# Altium PCB Test_Monitor_PCB1.PcbDoc (part 2 of 3)
Units mm, origin at the board's own origin, x right, y up, seen from the top; angles counter-clockwise.
Board outline 100 x 83 mm, 4 copper layers (Top Layer, GND1, GND2, Bottom Layer), stack 1.57 mm thick; 215 components, 124 nets, 896 pads, 300 vias.
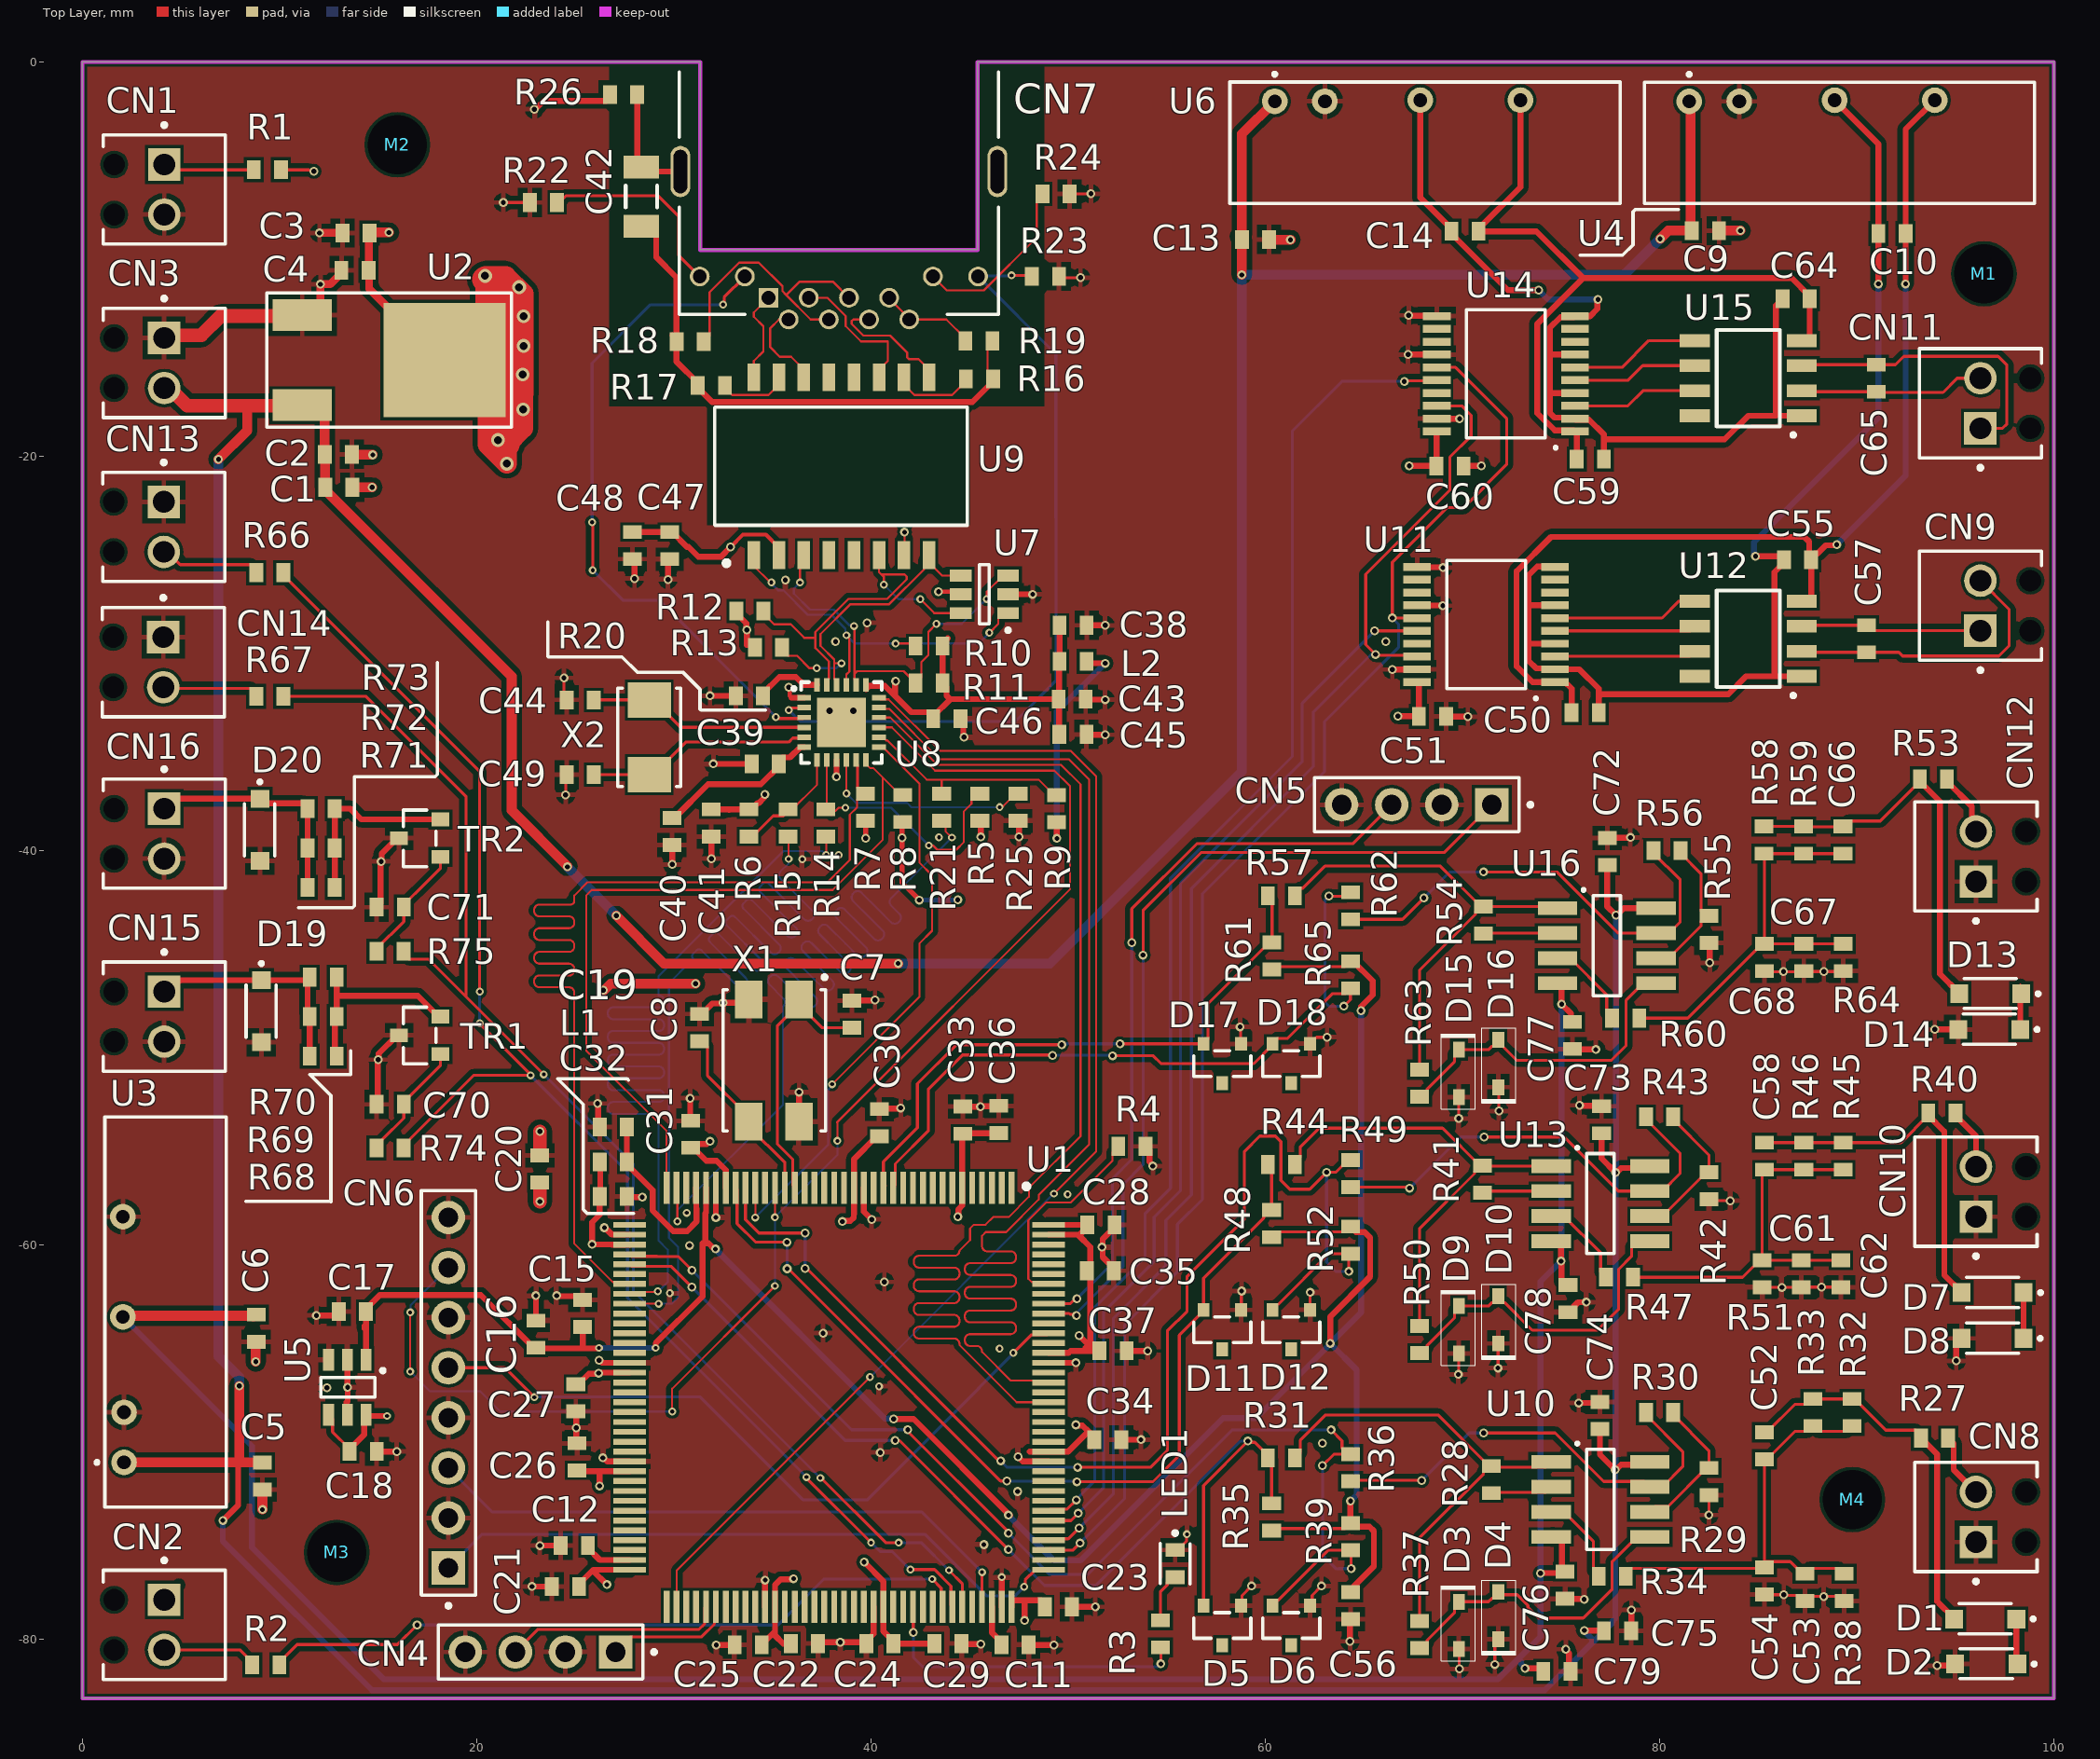
[diagram p0: Top Layer view]

## Via types
v1: diameter 0.45, hole 0.25, Top Layer to Bottom Layer, 224 vias
v2: diameter 0.4, hole 0.2, Top Layer to Bottom Layer, 66 vias
v3: diameter 0.7, hole 0.4, Top Layer to Bottom Layer, 8 vias
v4: diameter 0.66, hole 0.33, Top Layer to Bottom Layer, 2 vias

## Nets (pads, with @x,y where several pads share a name; then routed paths per layer and width w, separated by ;. In a path a pad name is that pad's centre, name@x,y a point inside that pad or via, vN(x,y) a via of type N, cw(c..) or ccw(c..) an arc to the next point about the centre after c; other vN are vias at no path point) (continued)
GND: (continued)
  Top Layer w0.381: CN16.2@4.27,-40.41 CN16.2@4.325,-40.465 ; CN15.2@4.37,-49.69 CN15.2@4.405,-49.725 ; D20.1@8.945,-40.465 D20.1@9,-40.52
  Top Layer w0.4: U2.1@11.145,-12.835 11.325,-12.835 12.075,-12.085 v1(12.075,-11.275) 12.085,-11.265 12.572,-11.265 13.138,-10.7 C4.1@13.138,-10.575 C4.1@13.163,-10.55 ; v1(12.025,-8.675) C3.1@13.188,-8.675 C3.1@13.163,-8.7 ; C2.1@13.662,-19.9 C2.1@13.683,-19.92 ; v1@14.715,-19.92 v1(14.725,-19.93)
  Top Layer w0.5: v1(8.793,-65.923) C6.1@8.793,-64.933 ; v1(9.128,-73.425) C5.1@9.128,-72.412 ; C2.1@13.683,-19.92 v1@14.715,-19.92 ; C1.1@13.687,-21.575 v1(14.7,-21.575) ; C13.1@60.212,-9.025 v1(61.275,-9.025) ; C9.1@83.012,-8.556 v1(84.1,-8.556)
  Top Layer w0.7: CN3.1@4.15,-14 4.285,-13.865 6.025,-13.865 7,-12.89 11.09,-12.89 U2.1@11.145,-12.835 ; C20.1@23.2,-55.463 v1(23.2,-54.25)
  other v1: 88.325,-77.831 45.725,-75.2 47.435,-72.505 40.47,-70.525 62.895,-70.055 12.394,-67.25 37.569,-64.475 40.675,-61.88 30.79,-60.025 38.2,-29.4 66.115,-29.4 39.8,-28.45 35.655,-26.28
  other v2: 40.405,-67.175 46.52,-65.255 29.79,-62.45 30.653,-58.372 49.975,-57.44 36.51,-40.44 38.36,-40.225 43.446,-39.331
  other v4: 37.9,-32.9 39.1,-32.9
NetC7_2: C7.2 U1.23 X1.1 | length 13.3
  Top Layer w0.15: U1.23@36.13,-57.105 36.03,-57.005 36.03,-55.655 35.243,-54.868 35.243,-48.897 36.34,-47.8 37.528,-48.988 C7.2@39.037,-48.988
NetC8_2: C8.2 U1.24 X1.3 | length 9.6
  Top Layer w0.15: C8.2@31.3,-49.663 31.425,-49.663 31.7,-49.938 31.7,-51.4 33.8,-53.5 X1.3@33.8,-54 ; X1.3@33.8,-53.75 X1.3@33.8,-54 ; U1.24@35.63,-57.105 35.63,-55.83 X1.3@33.8,-54
NetC11_1: C11.1 U1.106 | length 2.1
  Top Layer w0.3: U1.106@46.13,-78.355 46.13,-79.667 46.613,-80.15 C11.1@46.613,-80.275